# Altium PCB RS485_Node.PcbDoc
Units mil, origin at the board's own origin, x right, y up, seen from the top; angles counter-clockwise.
Board outline 1181.1 x 320 mil, 2 copper layers (Top Layer, Bottom Layer); 9 components, 10 nets, 37 pads, 18 vias.
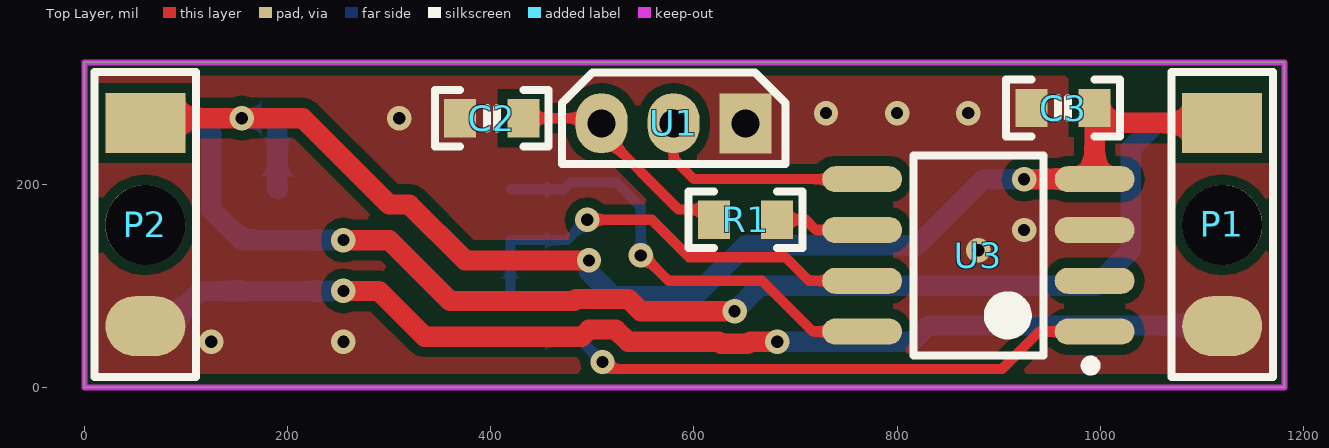
[diagram p0: Top Layer view]
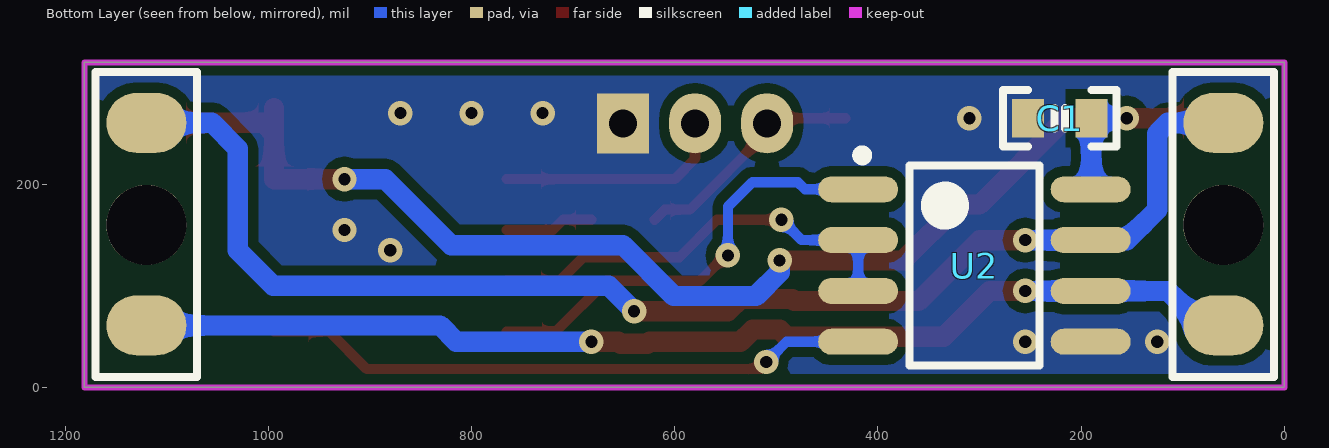
[diagram p1: Bottom Layer view, seen from below]
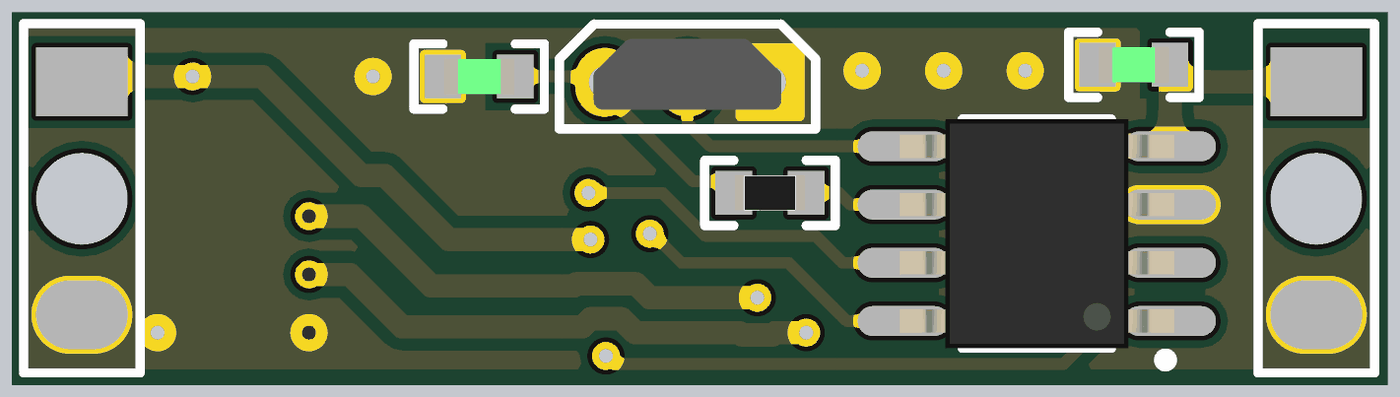
[diagram p2: 3D render of the assembled board from above, using the file's embedded part models]

## Layer stack, top to bottom
Top Solder: solder mask 0.4, Solder Resist, Dk 3.5
Top Layer: signal copper 1.4
Dielectric 1: dielectric 12.6, FR-4, Dk 4.8
Bottom Layer: signal copper 1.4
Bottom Solder: solder mask 0.4, Solder Resist, Dk 3.5

## Board outline
0,0 1181.1,0 1181.1,320 0,320

## Design rules (kind name [scope] priority, off if disabled: settings)
Clearance [All] p1: gap=10 ignorepadtopadclearanceinfootprint=FALSE except(0: Arc-Hole Track-Hole SMDPad-Hole THPad-Hole Via-Hole Fill-Hole Poly-Hole Region-Hole Text-Hole)
PlaneConnect [All] p1: planeconnectstyle=Direct reliefexpansion=20 reliefentries=4 reliefconductorwidth=10 reliefairgap=10
PolygonConnect [All] p1: connectstyle=Direct reliefconductorwidth=10 reliefentries=4 polygonreliefangle="90 Angle" airgapwidth=10
RoutingVias [All] p1: holewidth=12 width=24 viastyle="Through Hole" minholewidth=12 minwidth=24 maxholewidth=12 maxwidth=24
SolderMaskExpansion [All] p1: expansion=4
Width [All] p1: maxlimit=20 minlimit=10 preferedwidth=20
29 further rules are at their usual default settings.

## Components (designator, comment, footprint, x,y, rotation, side; value= is the part's Value field where it differs from the comment)
C1 "Cap" C_0603 221.1,265 r180 bottom value=100nF
C2 "Cap" C_0603 401.1,265 r180 top value=100nF
C3 "Cap" C_0603 963.32,275 r180 top value=100nF
P1 "Header 2X2B" CONN_4PIN 1120,260.39 r0 top locked
P2 "Header 2X2B" CONN_4PIN 60,260.39 r0 top locked
R1 "Res1" R_0603 650.87,165 r180 top value=220R
U1 "TSIC506" TO92UA_A 580,260 r90 top
U2 "MAX485" SOIC_8 305,120 r180 bottom
U3 "STM8L001J3" SOIC_8 880,130 r180 top locked

## Footprints (in the part's own frame and the unit in brackets; to place one, negate y for a bottom-side part, rotate by r counter-clockwise, add the part's x,y. Pads: shape width x height; smd on the part's side, far side on the other; paste and mask are expansions set on the pad)
C_0603 [mm]
  rect 0.8x0.96 smd: 1(-0.79,0) 2(0.79,0)
  silkscreen extent -1.42,-0.71 1.42,0.71, body extent -0.76,-0.39 0.76,0.39, height 0.9
CONN_4PIN [mm] "带有牵引孔的双面焊盘"
  round 2 hole 2 unplated: 0(0,-2.55)
  rect 2x1.5 smd: 1(0,0)
  oval 2x1.5 smd: 2(0,-5.08)
  oval 2x1.5 smd far side: 3(0,0) 4(0,-5.065)
  silkscreen extent -1.27,-6.35 1.27,1.27
R_0603 [mm]
  rect 0.8x0.96 smd: 1(-0.79,0) 2(0.79,0)
  silkscreen extent -1.42,-0.71 1.42,0.71, body extent -0.76,-0.38 0.76,0.38, height 0.41
SOIC_8 [mm]
  oval 2x0.65 smd: 1(-2.906,1.905) 2(-2.906,0.635) 3(-2.906,-0.635) 4(-2.906,-1.905) 5(2.906,-1.905) 6(2.906,-0.635) 7(2.906,0.635) 8(2.906,1.905)
  silkscreen extent -2.93,-2.5 1.63,2.88, body extent -3,-2.5 3,2.5, height 1.8
TO92UA_A [mm]
  rect 1.5x1.3 hole 0.7: 1(0,-1.8)
  oval 1.5x1.3 hole 0.7: 2(0,0) 3(0,1.8)
  silkscreen extent -1.02,-2.79 1.27,2.79, body extent -0.6,-2.05 0.95,2.05, height 6

## Part data
C1 C2 C3: "无极性电容", LatestRevisionDate=17-Jul-2002, LatestRevisionNote="Re-released for DXP Platform.", PackageReference=RAD-0.3, Published=8-Jun-2000, Publisher="Altium Limited"
P1 P2: "接插件", LatestRevisionDate=17-Jul-2002, LatestRevisionNote="Re-released for DXP Platform.", Publisher="Altium Limited"
R1: "贴片电阻", LatestRevisionDate=17-Jul-2002, LatestRevisionNote="Re-released for DXP Platform.", PackageReference=AXIAL-0.4, Published=8-Jun-2000, Publisher="Altium Limited"
U1: "TSic TM系列芯片采用基于世界领先水平的专业校准技术对温度传感器进行预先校准，测量使用简单，可长期稳定地达到高精度效果。"
U3: "The STM8S001J3 device provides the following benefits: performance, robustness and reduced system cost. / Device performance and robustness are ensured by true data EEPROM supporting up to 100000 write/erase cycles, advanced core and peripherals made in a state-of-the-art technology at 16 MHz clock frequency, robust I/Os, independent watchdogs with separate clock source, and a clock security system. / The system cost is reduced thanks to a high system integration level with internal clock oscillators, watchdog, and brown-out reset. / Full documentation is offered as well as a wide choice of development tools."

## Via types
v1: diameter 24, hole 12, Top Layer to Bottom Layer, 18 vias

## Nets (pads, with @x,y where several pads share a name; then routed paths per layer and width w, separated by ;. In a path a pad name is that pad's centre, name@x,y a point inside that pad or via, vN(x,y) a via of type N, cw(c..) or ccw(c..) an arc to the next point about the centre after c; other vN are vias at no path point)
A: P1.4 P2.4 U2.6 | length 1108.9
  Top Layer w20: v1(255,95) 290,95 335,50 489.75,50 496.75,57 523.25,57 535.25,45 624.75,45 626.75,43 653.25,43 655.25,45 v1(681.97,45)
  Bottom Layer w20: P2.4 80.59,60.98 114.61,95 U2.6 v1(255,95) ; v1(681.97,45) 815,45 830.98,60.98 P1.4
B: P1.3 P2.3 U2.7 | length 1317.8
  Top Layer w20: v1(255,145) 300,145 360,85 482.32,85 484.32,87 535.68,87 547.68,75 v1(640,75)
  Bottom Layer w20: P2.3 114.61,260.39 123,252 123,251.75 125,249.75 125,175 155,145 U2.7 v1(255,145) ; v1(640,75) 665,100 995,100 1030,135 1030,235 1055.39,260.39 P1.3
CTR: U2.2 U2.3 U3.7 | length 429.3
  Top Layer w10: v1(495,165) 558.54,165 595.36,128.18 690.1,128.18 713.28,105 U3.7
  Bottom Layer w10: U2.3 U2.2 475,145 v1(495,165)
DQ: U1.2 U3.5 | length 228.9
  Top Layer w10: U1.2 580,225 600,205 U3.5
GND: C1.1 C2.2 C3.2 P1.2 P2.2 U1.1 U2.5 U3.3
  other v1: 125,45 255,45 880,135 925,155 310,265 730,270 800,270 870,270
NetC2_1: C2.1 R1.2 U1.3 | length 234.3
  Top Layer w10: C2.1 504.13,265 U1.3 509.13,250.87 585,175 609.76,175 R1.2
PWR: R1.1 U3.6 | length 87.7
  Top Layer w10: R1.1 710,165 720,155 U3.6
RXD: U2.1 U3.8 | length 438
  Top Layer w10: v1(547.68,130) 550,130 575,105 667,105 717,55 U3.8
  Bottom Layer w10: U2.1 471.82,195 478.82,202 523.57,202 547.68,177.89 v1(547.68,130)
TXD: U2.4 U3.1 | length 601.5
  Top Layer w10: v1(510,25) 517,18 903,18 940,55 U3.1
  Bottom Layer w10: U2.4 490,45 v1(510,25)
VCC: C1.2 C3.1 P1.1 P2.1 U2.8 U3.4 | length 1368.5
  Top Layer w20: P2.1 64.61,265 v1(155,265) 215,265 300,180 320,180 375,125 v1(496.75,125) ; v1(925,205) U3.4 994.43,250 ; C3.1 994.43,250 ; P1.1 1004.82,260.39 994.43,250
  Bottom Layer w20: v1(155,265) C1.2 190,195.57 U2.8 ; v1(496.75,125) 496.75,113.25 520,90 600.87,90 650.87,140 820,140 885,205 v1(925,205)
pads on no net: P1.0 P2.0 U3.2

## Polygon pours and split planes (outlines as drawn)
GND on Top Layer "Top Layer-No Net" (solid, remove dead copper, pour order 0): 0,320 1181.1,320 1181.1,0 0,0
GND on Bottom Layer "Bottom Layer-No Net" (solid, remove dead copper, pour order 2): 0,320 1181.1,320 1181.1,0 0,0

## Keep-outs
Keep-Out Layer:
  the board outline again, w6